# EAGLE board 0 TO 9 Counter 74LS90 (EAGLE 7.6.0)
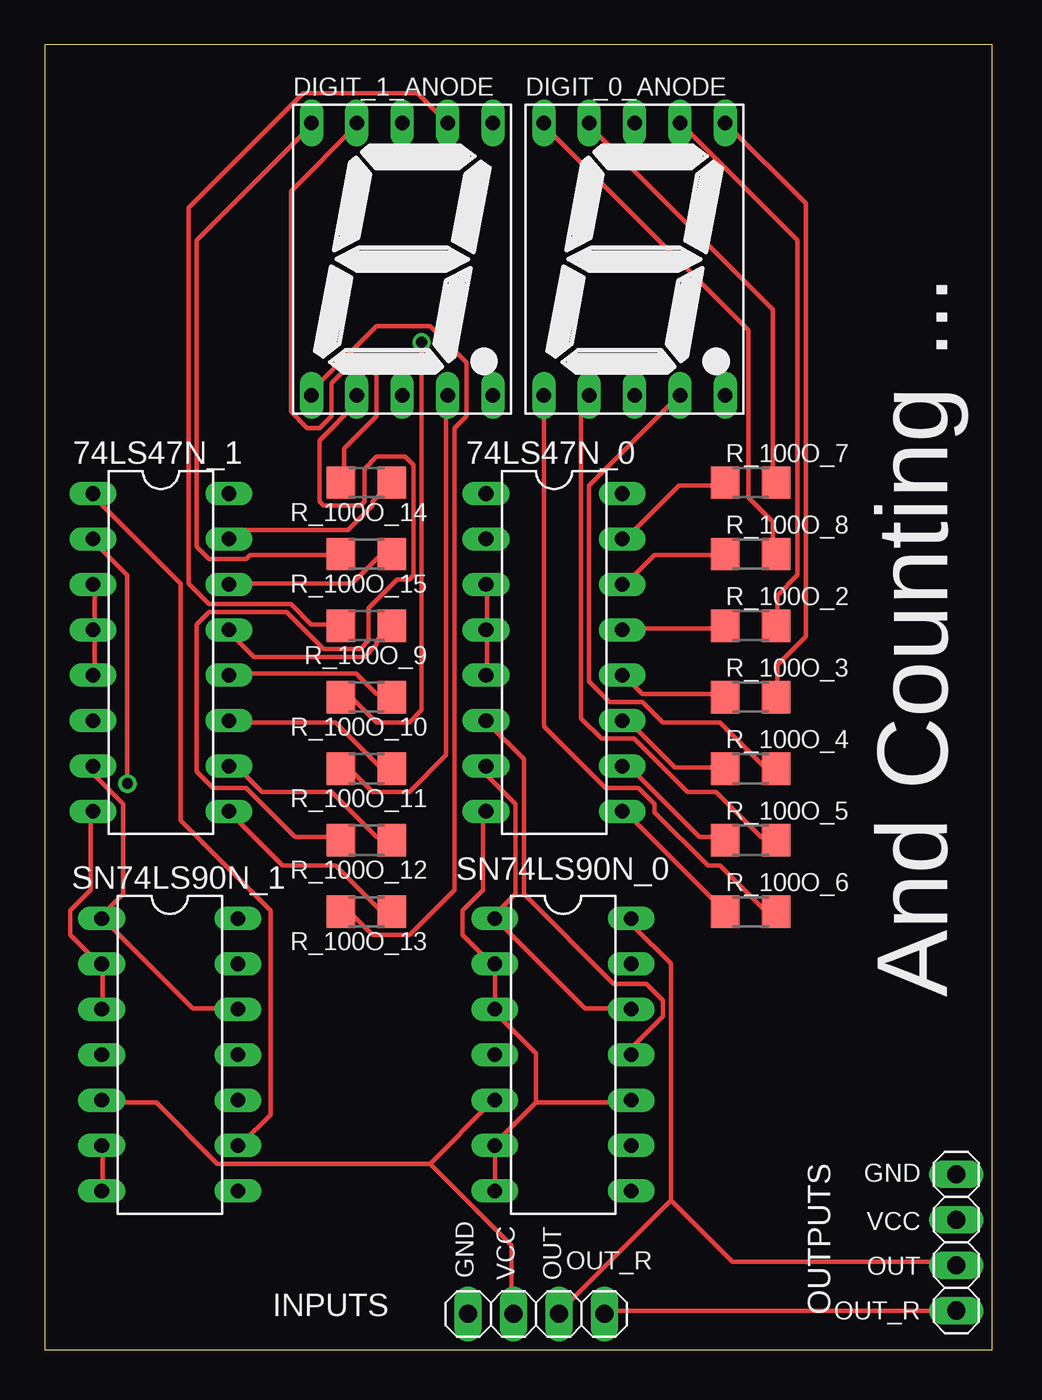
[diagram p0: board, top side]
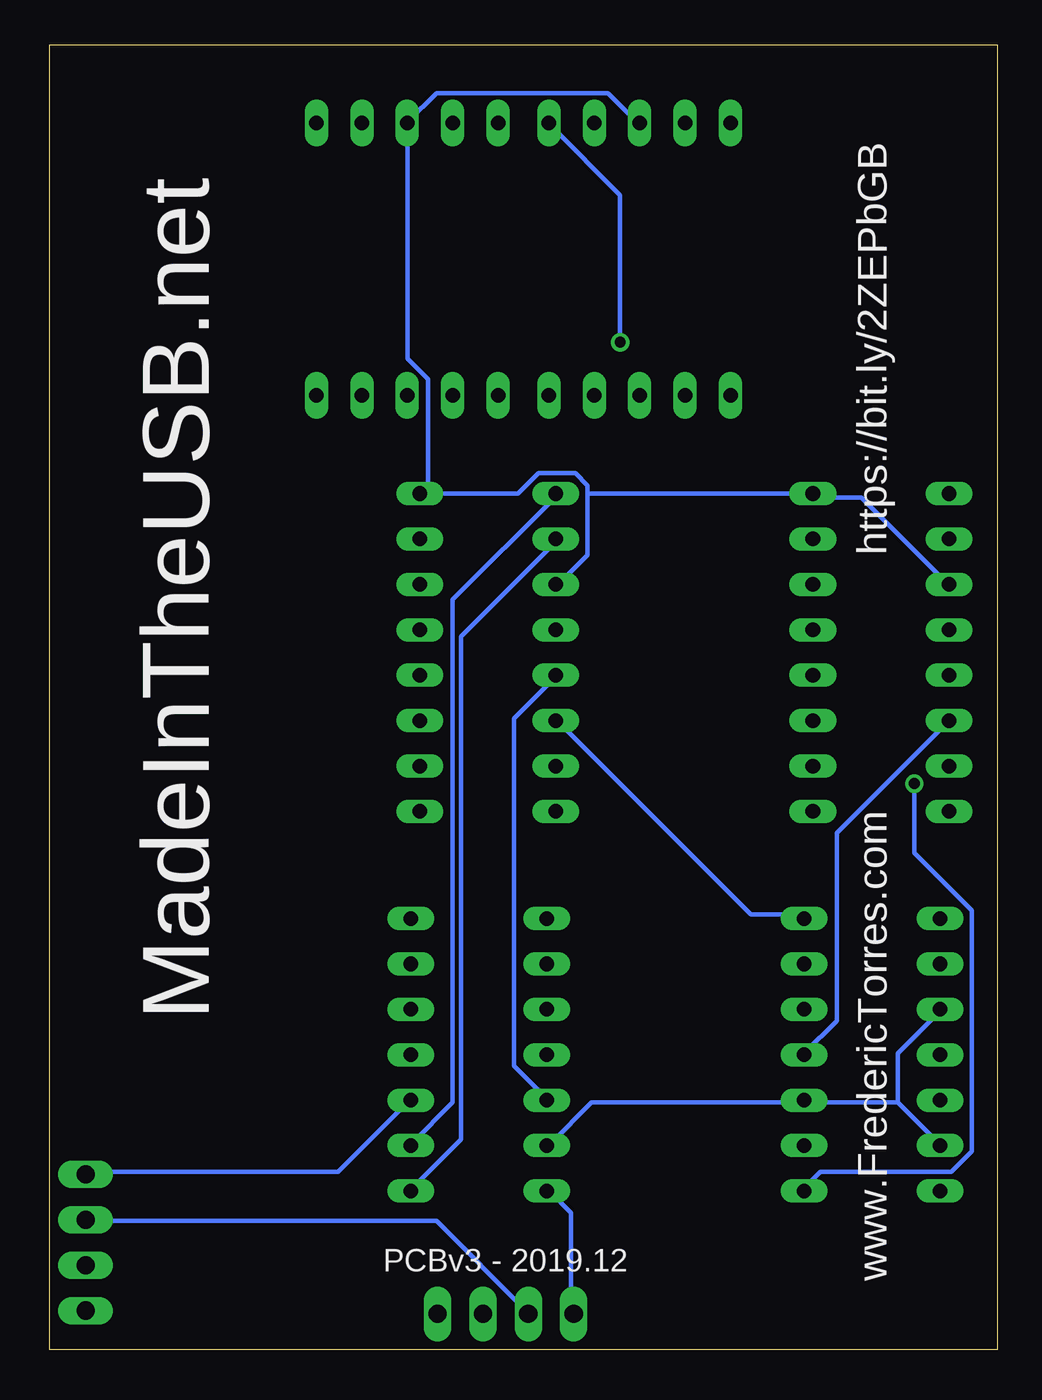
[diagram p1: board, bottom side, seen from below]

Size 53 x 73 mm. Coordinates in mm from the lower left corner, seen from the top.
Outline: 0,0 53,0 53,73 0,73 0,0
Copper layers (1*16): Top 0.035mm / dielectric 1.5mm / Bottom 0.035mm
Design rules "default": minimum track width 10mil, minimum drill 24mil, track to track 8mil, track to pad 8mil, pad to pad 8mil, via to via 8mil, smd to smd 8mil, copper to edge 40mil, drill to drill 8mil, minimum pad ring 10mil, minimum via ring 8mil, stop-mask expansion 4mil, vias tented up to drill 0mil, thermal gap 10mil

## Footprints (pad centres in the part's own frame; a part is rotated, then mirrored left to right if it is on the bottom)
DIL16 = drill 0.813 long: 1 -8.89,-3.81; 2 -6.35,-3.81; 3 -3.81,-3.81; 4 -1.27,-3.81; 5 1.27,-3.81; 6 3.81,-3.81; 7 6.35,-3.81; 8 8.89,-3.81; 9 8.89,3.81; 10 6.35,3.81; 11 3.81,3.81; 12 1.27,3.81; 13 -1.27,3.81; 14 -3.81,3.81; 15 -6.35,3.81; 16 -8.89,3.81
7SEG-13 = drill 0.813 long: 1 -5.08,-7.62; 2 -2.54,-7.62; 3 0,-7.62; 4 2.54,-7.62; 5 5.08,-7.62; 6 5.08,7.62; 7 2.54,7.62; 8 0,7.62; 9 -2.54,7.62; 10 -5.08,7.62
1X04 = drill 1.016 long: 1 -3.81,0; 2 -1.27,0; 3 1.27,0; 4 3.81,0
R1206 = smd 1.6 x 1.803: 1 -1.422,0; 2 1.422,0
DIL14 = drill 0.813 long: 1 -7.62,-3.81; 2 -5.08,-3.81; 3 -2.54,-3.81; 4 0,-3.81; 5 2.54,-3.81; 6 5.08,-3.81; 7 7.62,-3.81; 8 7.62,3.81; 9 5.08,3.81; 10 2.54,3.81; 11 0,3.81; 12 -2.54,3.81; 13 -5.08,3.81; 14 -7.62,3.81

## Placement (x,y rotation side)
74LS47N_0  74LS47N  [DIL16]  28.5,39 270 top
74LS47N_1  74LS47N  [DIL16]  6.5,39 270 top
DIGIT_0_ANODE  [7SEG-13]  33,61 0 top
DIGIT_1_ANODE  [7SEG-13]  20,61 0 top
JP_CLOCK_IN  [1X04]  27.5,2 0 top
OUTPUTS  [1X04]  51,6 270 top
R_100O_2  [R1206]  39.5,40.5 0 top
R_100O_3  [R1206]  39.5,36.5 0 top
R_100O_4  [R1206]  39.5,32.5 0 top
R_100O_5  [R1206]  39.5,28.5 0 top
R_100O_6  [R1206]  39.5,24.5 0 top
R_100O_7  [R1206]  39.5,48.5 0 top
R_100O_8  [R1206]  39.5,44.5 0 top
R_100O_9  [R1206]  18,40.5 180 top
R_100O_10  [R1206]  18,36.5 180 top
R_100O_11  [R1206]  18,32.5 180 top
R_100O_12  [R1206]  18,28.5 180 top
R_100O_13  [R1206]  18,24.5 180 top
R_100O_14  [R1206]  18,48.5 180 top
R_100O_15  [R1206]  18,44.5 180 top
SN74LS90N_0  74LS90N  [DIL14]  29,16.5 270 top
SN74LS90N_1  74LS90N  [DIL14]  7,16.5 270 top

## Library data of the parts
74LS47N_0 74LS47N_1 SN74LS90N_0 SN74LS90N_1 = 74xx-us
DIGIT_0_ANODE DIGIT_1_ANODE = special
JP_CLOCK_IN OUTPUTS = pinhead
R_100O_2-R_100O_15 = adafruit

## Nets
BIT_0: 74LS47N_0.7 SN74LS90N_0.1 SN74LS90N_0.12
BIT_1: 74LS47N_0.1 SN74LS90N_0.9
BIT_2: 74LS47N_0.2 SN74LS90N_0.8
BIT_2_0: 74LS47N_1.7 SN74LS90N_1.1 SN74LS90N_1.12
BIT_2_1: 74LS47N_1.1 SN74LS90N_1.9
BIT_2_2: 74LS47N_1.2 SN74LS90N_1.8
BIT_2_3: 74LS47N_1.6 SN74LS90N_1.11
BIT_3: 74LS47N_0.6 SN74LS90N_0.11 SN74LS90N_1.14
GND: 74LS47N_0.8 74LS47N_1.8 JP_CLOCK_IN.1 OUTPUTS.1 SN74LS90N_0.2 SN74LS90N_0.3 SN74LS90N_0.6 SN74LS90N_0.7 SN74LS90N_0.10 SN74LS90N_1.2 SN74LS90N_1.3 SN74LS90N_1.6 SN74LS90N_1.7 SN74LS90N_1.10
SEG_1_DA: 74LS47N_0.13 R_100O_2.1
SEG_1_DAA: DIGIT_0_ANODE.7 R_100O_2.2
SEG_1_DB: 74LS47N_0.12 R_100O_3.1
SEG_1_DBB: DIGIT_0_ANODE.6 R_100O_3.2
SEG_1_DC: 74LS47N_0.11 R_100O_4.1
SEG_1_DCC: DIGIT_0_ANODE.4 R_100O_4.2
SEG_1_DD: 74LS47N_0.10 R_100O_5.1
SEG_1_DDD: DIGIT_0_ANODE.2 R_100O_5.2
SEG_1_DE: 74LS47N_0.9 R_100O_6.1
SEG_1_DEE: DIGIT_0_ANODE.1 R_100O_6.2
SEG_1_DF: 74LS47N_0.15 R_100O_7.1
SEG_1_DFF: DIGIT_0_ANODE.9 R_100O_7.2
SEG_1_DG: 74LS47N_0.14 R_100O_8.1
SEG_1_DGG: DIGIT_0_ANODE.10 R_100O_8.2
SEG_2_DA: 74LS47N_1.13 R_100O_9.1
SEG_2_DAA: DIGIT_1_ANODE.7 R_100O_9.2
SEG_2_DB: 74LS47N_1.12 R_100O_10.1
SEG_2_DBB: DIGIT_1_ANODE.6 R_100O_10.2
SEG_2_DC: 74LS47N_1.11 R_100O_11.1
SEG_2_DCC: DIGIT_1_ANODE.4 R_100O_11.2
SEG_2_DD: 74LS47N_1.10 R_100O_12.1
SEG_2_DDD: DIGIT_1_ANODE.2 R_100O_12.2
SEG_2_DE: 74LS47N_1.9 R_100O_13.1
SEG_2_DEE: DIGIT_1_ANODE.1 R_100O_13.2
SEG_2_DF: 74LS47N_1.15 R_100O_14.1
SEG_2_DFF: DIGIT_1_ANODE.9 R_100O_14.2
SEG_2_DG: 74LS47N_1.14 R_100O_15.1
SEG_2_DGG: DIGIT_1_ANODE.10 R_100O_15.2
TMR555_OUTPUT: JP_CLOCK_IN.3 OUTPUTS.3 SN74LS90N_0.14
TMR555_OUTPUT_REVERSE: JP_CLOCK_IN.4 OUTPUTS.4
VCC: 74LS47N_0.3 74LS47N_0.4 74LS47N_0.5 74LS47N_0.16 74LS47N_1.3 74LS47N_1.4 74LS47N_1.5 74LS47N_1.16 DIGIT_0_ANODE.8 DIGIT_1_ANODE.8 JP_CLOCK_IN.2 OUTPUTS.2 SN74LS90N_0.5 SN74LS90N_1.5

## Tracks (layer width: path | path; a pad name or v marks a point on that pad's centre or on a via)
BIT_0
  Top 0.254: SN74LS90N_0.12 32.75,19.09 30.23,19.09 25.2,24.12 SN74LS90N_0.1 25.2,24.35 26.35,25.49 26.35,30.52 24.75,32.12 24.75,32.58 74LS47N_0.7
BIT_1
  Bottom 0.254: 74LS47N_0.1 24.75,47.66 30.46,41.95 30.46,13.83 32.75,11.55 SN74LS90N_0.9
BIT_2
  Bottom 0.254: 74LS47N_0.2 24.75,45.15 30,39.89 30,11.77 32.75,9.03 SN74LS90N_0.8
BIT_2_0
  Top 0.254: SN74LS90N_1.12 10.8,19.09 8.29,19.09 3.26,24.12 SN74LS90N_1.1 3.26,24.35 4.4,25.49 4.4,30.52 2.8,32.12 2.8,32.58 74LS47N_1.7
BIT_2_1
  Top 0.254: 74LS47N_1.1 2.8,47.66 7.6,42.86 7.6,29.6 12.63,24.58 12.63,13.15 11.03,11.55 SN74LS90N_1.9
BIT_2_2  (via drill 0.61)
  Top 0.254: v4.63,31.66 4.63,43.32 2.8,45.15 74LS47N_1.2
  Bottom 0.254: v4.63,31.66 4.63,27.78 1.43,24.58 1.43,11.09 2.57,9.95 9.89,9.95 10.8,9.03 SN74LS90N_1.8
BIT_2_3
  Bottom 0.254: 74LS47N_1.6 2.8,35.09 8.97,28.92 8.97,18.4 10.8,16.57 SN74LS90N_1.11
BIT_3
  Top 0.254: SN74LS90N_0.11 32.98,16.57 32.98,17.03 34.58,18.63 34.58,19.55 33.66,20.46 31.83,20.46 26.8,25.49 26.8,33.03 24.75,35.09 74LS47N_0.6
  Bottom 0.254: SN74LS90N_1.14 11.03,24.35 13.77,24.35 24.52,35.09 74LS47N_0.6
GND
  Top 0.254: SN74LS90N_1.3 3.26,19.09 3.26,21.38 SN74LS90N_1.2 3.03,21.6 1.43,23.2 1.43,24.58 2.57,25.72 2.57,30.06 74LS47N_1.8 | SN74LS90N_1.7 3.26,9.03 3.26,11.32 SN74LS90N_1.6 | 74LS47N_0.8 24.52,30.06 24.52,25.72 23.38,24.58 23.38,23.2 24.98,21.6 SN74LS90N_0.2 25.2,21.38 25.2,19.09 SN74LS90N_0.3 25.2,18.86 27.49,16.57 27.49,13.83 | SN74LS90N_0.7 25.2,9.03 25.2,11.32 SN74LS90N_0.6 25.2,11.55 27.49,13.83 | 27.49,13.83 32.75,13.83 SN74LS90N_0.10
  Bottom 0.254: 5.54,13.83 10.8,13.83 SN74LS90N_1.10 11.03,13.83 22.69,13.83 24.98,11.55 SN74LS90N_0.6 | 5.54,13.83 3.26,11.55 SN74LS90N_1.6 | 5.54,13.83 5.54,16.57 3.26,18.86 SN74LS90N_1.3 | JP_CLOCK_IN.1 23.83,2.17 23.83,7.66 24.98,8.8 SN74LS90N_0.7 | OUTPUTS.1 50.81,9.95 36.86,9.95 32.98,13.83 SN74LS90N_0.10
SEG_1_DA
  Top 0.254: R_100O_2.1 38.01,40.35 32.52,40.35 74LS47N_0.13
SEG_1_DAA
  Top 0.254: R_100O_2.2 40.98,40.58 40.98,42.18 42.12,43.32 42.12,62.07 35.72,68.47 DIGIT_0_ANODE.7
SEG_1_DB
  Top 0.254: R_100O_3.1 38.01,36.69 33.43,36.69 32.52,37.61 74LS47N_0.12
SEG_1_DBB
  Top 0.254: R_100O_3.2 40.98,36.69 40.98,38.29 42.58,39.89 42.58,64.12 38.23,68.47 DIGIT_0_ANODE.6
SEG_1_DC
  Top 0.254: R_100O_4.1 38.01,32.58 35.26,32.58 32.52,35.32 74LS47N_0.11
SEG_1_DCC
  Top 0.254: R_100O_4.2 40.75,32.58 40.29,32.58 37.78,35.09 34.58,35.09 33.43,36.23 31.6,36.23 30.46,37.38 30.46,48.35 35.49,53.38 DIGIT_0_ANODE.4
SEG_1_DD
  Top 0.254: R_100O_5.1 38.01,28.69 36.63,28.69 32.52,32.81 74LS47N_0.10
SEG_1_DDD
  Top 0.254: R_100O_5.2 40.75,28.69 40.06,28.69 37.55,31.2 35.95,31.2 32.98,34.18 31.15,34.18 30,35.32 30,53.15 30.23,53.38 DIGIT_0_ANODE.2
SEG_1_DE
  Top 0.254: R_100O_6.1 38.01,24.58 32.52,30.06 74LS47N_0.9
SEG_1_DEE
  Top 0.254: R_100O_6.2 40.75,24.58 40.29,24.58 37.78,27.09 37.09,27.09 34.12,30.06 34.12,30.52 33.2,31.43 31.38,31.43 27.95,34.86 27.95,53.38 DIGIT_0_ANODE.1
SEG_1_DF
  Top 0.254: R_100O_7.1 38.01,48.35 35.49,48.35 32.52,45.38 74LS47N_0.15
SEG_1_DFF
  Top 0.254: R_100O_7.2 40.75,48.58 40.75,58.18 30.46,68.47 DIGIT_0_ANODE.9
SEG_1_DG
  Top 0.254: R_100O_8.1 38.01,44.46 34.12,44.46 32.52,42.86 74LS47N_0.14
SEG_1_DGG
  Top 0.254: R_100O_8.2 40.75,44.69 40.75,46.29 39.38,47.66 39.38,57.04 27.95,68.47 DIGIT_0_ANODE.10
SEG_2_DA
  Top 0.254: R_100O_9.1 19.26,40.35 18.57,39.66 18.57,39.44 17.89,38.75 11.72,38.75 10.34,40.12 74LS47N_1.13
SEG_2_DAA
  Top 0.254: R_100O_9.2 16.52,40.58 14.92,40.58 13.77,41.72 9.2,41.72 8.06,42.86 8.06,63.89 14.46,70.3 20.86,70.3 22.46,68.7 DIGIT_1_ANODE.7
SEG_2_DB
  Top 0.254: R_100O_10.1 19.26,36.69 18.57,36.69 17.43,37.84 10.34,37.84 74LS47N_1.12
SEG_2_DBB  (via drill 0.61)
  Top 0.254: v21.09,56.35 21.09,35.78 20.4,35.09 18.57,35.09 17.2,36.46 16.75,36.46 R_100O_10.2
  Bottom 0.254: v21.09,56.35 21.09,64.58 24.98,68.47 DIGIT_1_ANODE.6
SEG_2_DC
  Top 0.254: R_100O_11.1 19.26,32.58 18.8,32.58 16.29,35.09 10.34,35.09 74LS47N_1.11
SEG_2_DCC
  Top 0.254: R_100O_11.2 16.75,32.35 17.2,32.35 18.34,31.2 20.4,31.2 22.46,33.26 22.46,53.38 DIGIT_1_ANODE.4
SEG_2_DD
  Top 0.254: R_100O_12.1 19.26,28.69 18.57,28.69 16.06,31.2 12.17,31.2 10.8,32.58 10.34,32.58 74LS47N_1.10
SEG_2_DDD
  Top 0.254: R_100O_12.2 16.52,28.69 14,28.69 11.26,31.43 9.43,31.43 8.52,32.35 8.52,40.58 9.2,41.26 13.54,41.26 15.6,39.21 17.66,39.21 18.12,39.66 18.12,41.49 19.72,43.09 20.4,43.09 20.63,43.32 20.63,49.49 20.17,49.95 18.57,49.95 17.89,49.27 17.89,47.44 17.66,47.21 15.6,47.21 15.37,47.44 15.37,50.87 17.43,52.92 17.43,53.38 DIGIT_1_ANODE.2
SEG_2_DE
  Top 0.254: R_100O_13.1 19.26,24.58 18.8,24.58 16.29,27.09 13.32,27.09 10.34,30.06 74LS47N_1.9
SEG_2_DEE
  Top 0.254: R_100O_13.2 16.75,24.35 17.2,24.35 18.34,23.2 20.4,23.2 22.92,25.72 22.92,51.55 23.6,52.24 23.6,55.21 21.55,57.27 18.57,57.27 14.92,53.61 DIGIT_1_ANODE.1
SEG_2_DF
  Top 0.254: R_100O_14.1 19.26,48.35 18.34,47.44 18.34,47.21 16.97,45.84 10.8,45.84 10.34,45.38 74LS47N_1.15
SEG_2_DFF
  Top 0.254: R_100O_14.2 16.75,48.58 16.75,50.41 18.57,52.24 18.57,54.52 17.89,55.21 17.2,55.21 16.06,54.06 16.06,52.24 15.37,51.55 14.69,51.55 13.77,52.47 13.77,64.81 17.43,68.47 DIGIT_1_ANODE.9
SEG_2_DG
  Top 0.254: R_100O_15.1 19.26,44.46 18.8,44.46 17.2,42.86 10.34,42.86 74LS47N_1.14
SEG_2_DGG
  Top 0.254: R_100O_15.2 16.52,44.46 11.49,44.46 11.26,44.24 9.2,44.24 8.52,44.92 8.52,62.07 14.92,68.47 DIGIT_1_ANODE.10
TMR555_OUTPUT
  Top 0.254: 35.03,8.34 35.03,21.6 32.98,23.66 32.98,24.12 SN74LS90N_0.14 | 35.03,8.34 28.86,2.17 JP_CLOCK_IN.3 | 35.03,8.34 38.46,4.92 50.81,4.92 OUTPUTS.3
TMR555_OUTPUT_REVERSE
  Top 0.254: JP_CLOCK_IN.4 31.38,2.17 50.81,2.17 OUTPUTS.4
VCC
  Top 0.254: 21.55,10.4 9.66,10.4 6.23,13.83 3.26,13.83 SN74LS90N_1.5 | 21.55,10.4 24.98,13.83 SN74LS90N_0.5 | 21.55,10.4 26.12,5.83 26.12,2.17 JP_CLOCK_IN.2 | 74LS47N_1.5 2.8,37.84 2.8,40.12 74LS47N_1.4 2.8,40.35 2.8,42.63 74LS47N_1.3 | 74LS47N_0.5 24.75,37.84 24.75,40.12 74LS47N_0.4 24.75,40.35 24.75,42.63 74LS47N_0.3
  Bottom 0.254: OUTPUTS.2 50.81,7.2 31.38,7.2 26.35,2.17 JP_CLOCK_IN.2 | 74LS47N_1.3 2.8,42.86 7.6,47.66 10.12,47.66 74LS47N_1.16 10.34,47.89 22.92,47.89 | DIGIT_1_ANODE.8 20.17,68.7 21.77,70.3 31.38,70.3 32.98,68.7 DIGIT_0_ANODE.8 32.98,68.47 32.98,55.44 31.83,54.29 31.83,47.89 | 31.83,47.89 26.8,47.89 25.66,49.04 23.6,49.04 22.92,48.35 22.92,47.89 | 31.83,47.89 32.29,47.89 74LS47N_0.16 31.83,47.89 | 22.92,47.89 22.92,44.46 24.52,42.86 74LS47N_0.3 | SN74LS90N_0.5 25.2,14.06 27.03,15.89 27.03,35.32 24.75,37.61 74LS47N_0.5

## Text on the board
tNames: And Counting ... | GND | VCC | OUT_R | OUT | GND | VCC | OUT | OUT_R | INPUTS
bNames: https://bit.ly/2ZEPbGB | MadeInTheUSB.net | www.FredericTorres.com | PCBv3 - 2019.12